# EAGLE board layout_breakout_pcb (EAGLE 9.7.0)
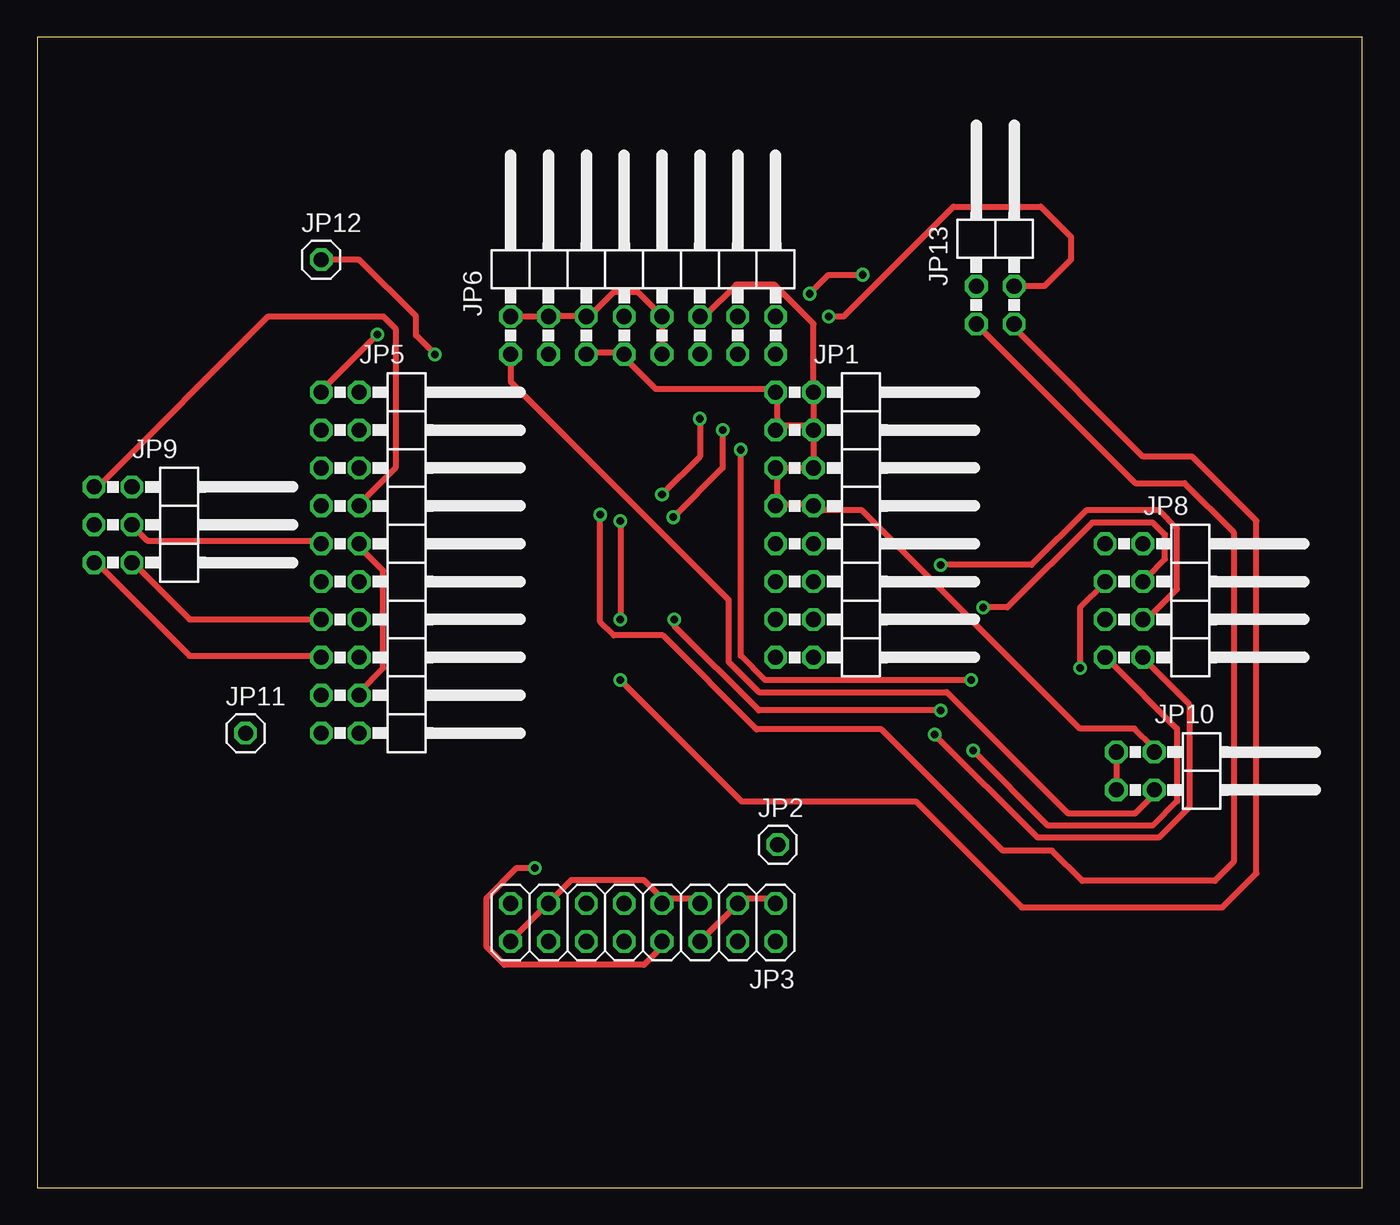
[diagram p0: board, top side]
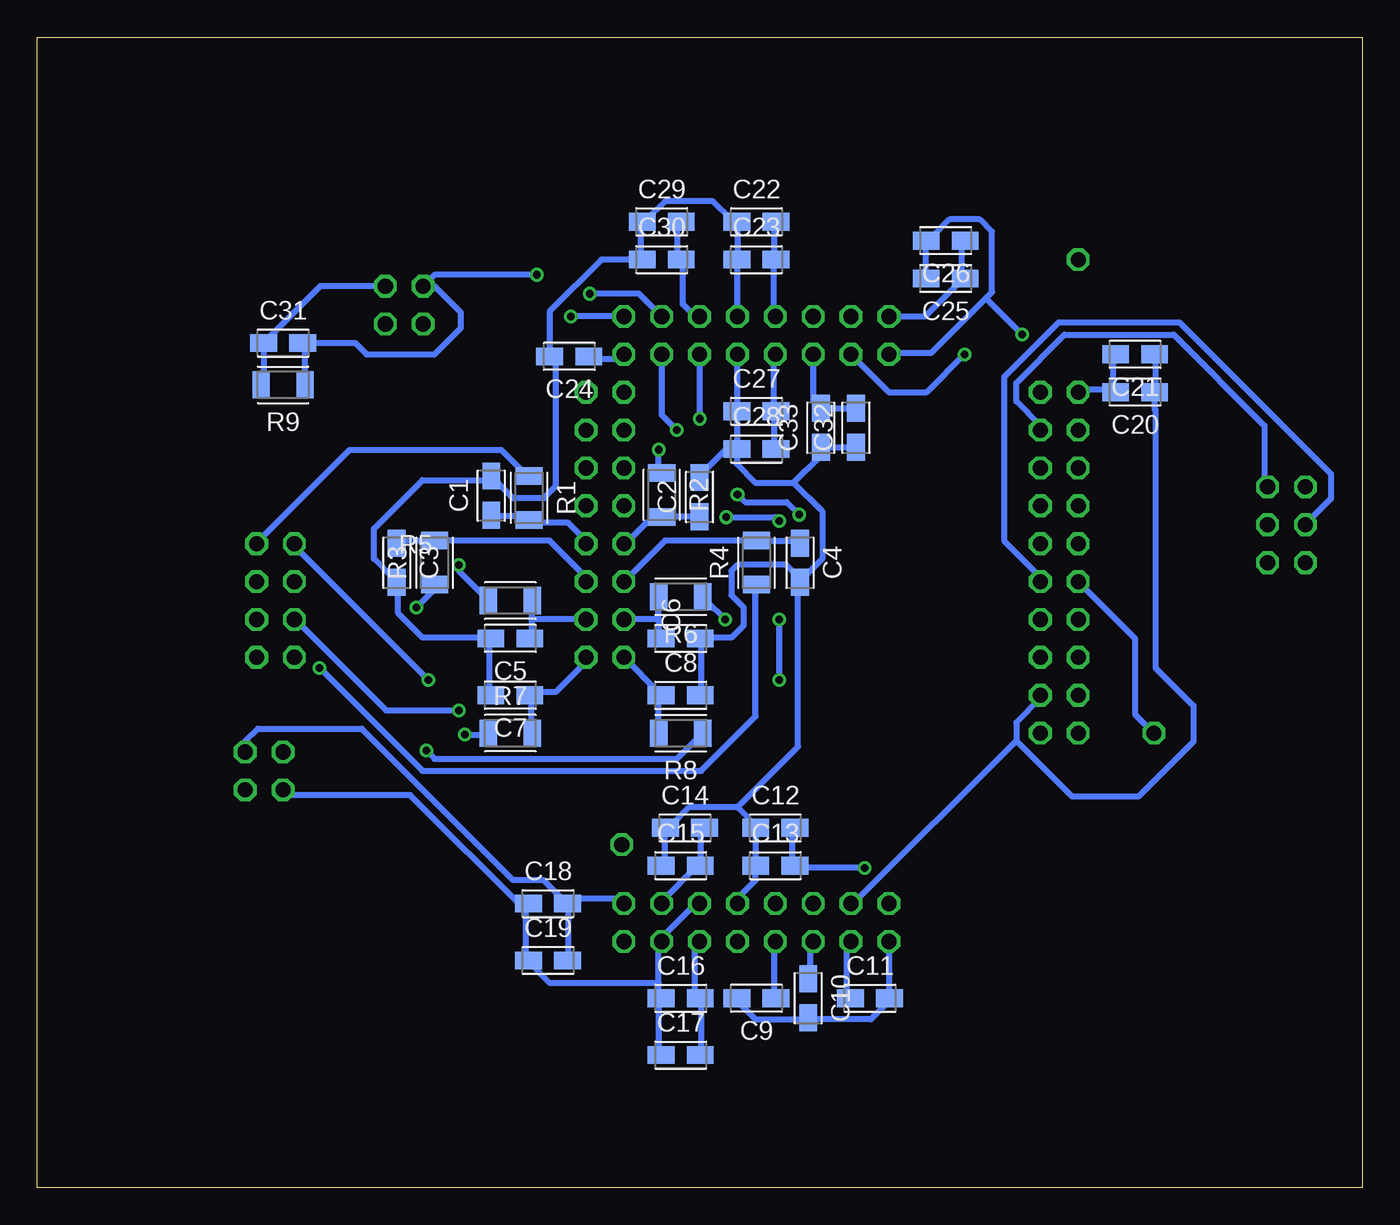
[diagram p1: board, bottom side, seen from below]

Size 88.88 x 77.14 mm. Coordinates in mm from the lower left corner, seen from the top.
Outline: 0,0 88.88,0 88.88,77.14 0,77.14 0,0
Copper layers (1*16): Top 0.035mm / dielectric 1.5mm / Bottom 0.035mm
Design rules "default *": minimum track width 16mil, minimum drill 20mil, track to track 16mil, track to pad 16mil, pad to pad 16mil, via to via 16mil, smd to smd 16mil, copper to edge 40mil, drill to drill 6mil, minimum pad ring 10mil, minimum via ring 8mil, stop-mask expansion 4mil, vias tented up to drill 0mil, thermal gap 10mil

## Footprints (pad centres in the part's own frame; a part is rotated, then mirrored left to right if it is on the bottom)
CAPM3216X180 = smd 1.796 x 1.189: 1 -1.31,0; 2 1.31,0
2X08/90 = drill 1.016 octagon: 1 -8.89,-6.35; 2 -8.89,-3.81; 3 -6.35,-6.35; 4 -6.35,-3.81; 5 -3.81,-6.35; 6 -3.81,-3.81; 7 -1.27,-6.35; 8 -1.27,-3.81; 9 1.27,-6.35; 10 1.27,-3.81; 11 3.81,-6.35; 12 3.81,-3.81; 13 6.35,-6.35; 14 6.35,-3.81; 15 8.89,-6.35; 16 8.89,-3.81
1X01 = drill 1.016 octagon: 1 0,0
2X08 = drill 1.016 octagon: 1 -8.89,-1.27; 2 -8.89,1.27; 3 -6.35,-1.27; 4 -6.35,1.27; 5 -3.81,-1.27; 6 -3.81,1.27; 7 -1.27,-1.27; 8 -1.27,1.27; 9 1.27,-1.27; 10 1.27,1.27; 11 3.81,-1.27; 12 3.81,1.27; 13 6.35,-1.27; 14 6.35,1.27; 15 8.89,-1.27; 16 8.89,1.27
2X10/90 = drill 1.016 octagon: 1 -11.43,-6.35; 2 -11.43,-3.81; 3 -8.89,-6.35; 4 -8.89,-3.81; 5 -6.35,-6.35; 6 -6.35,-3.81; 7 -3.81,-6.35; 8 -3.81,-3.81; 9 -1.27,-6.35; 10 -1.27,-3.81; 11 1.27,-6.35; 12 1.27,-3.81; 13 3.81,-6.35; 14 3.81,-3.81; 15 6.35,-6.35; 16 6.35,-3.81; 17 8.89,-6.35; 18 8.89,-3.81; 19 11.43,-6.35; 20 11.43,-3.81
2X04/90 = drill 1.016 octagon: 1 -3.81,-6.35; 2 -3.81,-3.81; 3 -1.27,-6.35; 4 -1.27,-3.81; 5 1.27,-6.35; 6 1.27,-3.81; 7 3.81,-6.35; 8 3.81,-3.81
2X03/90 = drill 1.016 octagon: 1 -2.54,-6.35; 2 -2.54,-3.81; 3 0,-6.35; 4 0,-3.81; 5 2.54,-6.35; 6 2.54,-3.81
2X02/90 = drill 1.016 octagon: 1 -1.27,-6.35; 2 -1.27,-3.81; 3 1.27,-6.35; 4 1.27,-3.81
RESC3216X70 = smd 1.165 x 1.815: 1 -1.475,0; 2 1.475,0

## Placement (x,y rotation side)
C1  [CAPM3216X180]  58.42,46.4 90 bottom
C2  [CAPM3216X180]  44.45,46.31 90 bottom
C3  [CAPM3216X180]  64.77,41.91 270 bottom
C4  [CAPM3216X180]  37.72,41.91 270 bottom
C5  [CAPM3216X180]  57.15,36.83 180 bottom
C6  [CAPM3216X180]  45.72,36.83 0 bottom
C7  [CAPM3216X180]  57.15,33.02 180 bottom
C8  [CAPM3216X180]  45.72,33.02 0 bottom
C9  [CAPM3216X180]  40.64,12.7 180 bottom
C10  [CAPM3216X180]  37.17,12.7 270 bottom
C11  [CAPM3216X180]  33.02,12.7 0 bottom
C12  [CAPM3216X180]  39.37,24.13 0 bottom
C13  [CAPM3216X180]  39.37,21.59 0 bottom
C14  [CAPM3216X180]  45.43,24.13 0 bottom
C15  [CAPM3216X180]  45.72,21.59 0 bottom
C16  [CAPM3216X180]  45.72,12.7 0 bottom
C17  [CAPM3216X180]  45.72,8.89 0 bottom
C18  [CAPM3216X180]  54.61,19.05 0 bottom
C19  [CAPM3216X180]  54.61,15.24 0 bottom
C20  [CAPM3216X180]  15.24,53.34 180 bottom
C21  [CAPM3216X180]  15.24,55.88 180 bottom
C22  [CAPM3216X180]  40.64,64.77 0 bottom
C23  [CAPM3216X180]  40.64,62.23 0 bottom
C24  [CAPM3216X180]  53.2,55.74 180 bottom
C25  [CAPM3216X180]  27.94,60.96 180 bottom
C26  [CAPM3216X180]  27.94,63.5 180 bottom
C27  [CAPM3216X180]  40.64,52.07 0 bottom
C28  [CAPM3216X180]  40.64,49.53 0 bottom
C29  [CAPM3216X180]  46.99,64.77 0 bottom
C30  [CAPM3216X180]  46.99,62.23 0 bottom
C31  [CAPM3216X180]  72.39,56.64 0 bottom
C32  [CAPM3216X180]  33.96,50.96 90 bottom
C33  [CAPM3216X180]  36.31,50.95 90 bottom
JP1  PINHD-2X8/90  [2X08/90]  55.88,44.45 270 top
JP2  PINHD-1X1  [1X01]  49.67,23 0 top
JP3  PINHD-2X8  [2X08]  40.64,17.78 180 top
JP5  PINHD-2X10/90  [2X10/90]  25.4,41.91 270 top
JP6  PINHD-2X8/90  [2X08/90]  40.64,62.23 0 top
JP8  PINHD-2X4/90  [2X04/90]  77.98,39.37 270 top
JP9  PINHD-2X3/90  [2X03/90]  10.16,44.45 270 top
JP10  PINHD-2X2/90  [2X02/90]  78.74,27.94 270 top
JP11  PINHD-1X1  [1X01]  13.97,30.48 0 top
JP12  PINHD-1X1  [1X01]  19.05,62.23 0 top
JP13  PINHD-2X2/90  [2X02/90]  64.26,64.26 0 top
R1  [RESC3216X70]  55.88,46.25 270 bottom
R2  [RESC3216X70]  46.99,46.46 270 bottom
R3  [RESC3216X70]  62.23,41.91 90 bottom
R4  [RESC3216X70]  40.64,41.91 90 bottom
R5  [RESC3216X70]  57.15,39.37 0 bottom
R6  [RESC3216X70]  45.72,39.63 180 bottom
R7  [RESC3216X70]  57.15,30.48 0 bottom
R8  [RESC3216X70]  45.72,30.48 180 bottom
R9  [RESC3216X70]  72.39,53.84 180 bottom

## Library data of the parts
C1-C33 = Capacitor; CATEGORY: Capacitor
JP1-JP3 JP5 JP6 JP8-JP13 = Connector; CATEGORY: CONNECTOR; SUB-CATEGORY: PIN-HEADER
R1-R9 = Resistor; CATEGORY: Resistor; SUB-CATEGORY: Fixed

## Nets
1N: JP8.8 R7.1
1P: JP8.7 R8.1
2N: JP8.6 R5.1
2P: JP8.5 R6.1
3N: JP8.4 R3.1
3P: JP8.3 R4.1
4N: JP8.2 R1.1
4P: JP8.1 R2.1
9: C1.1 JP1.10 R1.2
10: C2.1 JP1.9 R2.2
11: C3.1 JP1.12 R3.2
12: C4.1 JP1.11 R4.2
13: C5.1 JP1.14 R5.2
14: C6.1 JP1.13 R6.2
15: C7.1 JP1.16 R7.2
16: C8.1 JP1.15 R8.2
26: JP2.1
27: JP3.2
36: JP3.9
38: JP3.11
42: JP3.15
57: JP5.19
58: JP5.20
59: JP5.17
62: JP5.16
64: JP5.14
69: JP5.7
71: JP5.5
72: JP5.6
73: JP5.3
76: JP5.2
AVDD: C14.2 C15.2 C16.2 C17.2 C18.2 C19.2 C27.2 C28.2 C29.2 C30.2 C32.2 C33.2 JP1.1 JP1.2 JP1.3 JP1.4 JP1.5 JP1.6 JP1.7 JP1.8 JP3.1 JP3.3 JP3.6 JP6.5 JP6.7 JP6.12 JP10.2
CLKSEL: JP6.3 JP12.1
CS: JP5.12 JP9.3
DIN: JP5.15 JP9.5
DOUT: JP5.8 JP9.1
DRDY: JP5.4 JP9.2
DVDD: C20.2 C21.2 C25.2 C26.2 JP5.1 JP6.1 JP10.4
GND: C1.2 C2.2 C3.2 C4.2 C5.2 C6.2 C7.2 C8.2 C9.2 C10.2 C11.2 C12.1 C13.1 C14.1 C15.1 C16.1 C17.1 C18.1 C19.1 C20.1 C21.1 C22.1 C23.1 C24.2 C25.1 C26.1 C27.1 C28.1 C29.1 C30.1 C32.1 C33.1 JP3.4 JP3.5 JP3.7 JP3.13 JP3.16 JP5.10 JP5.18 JP6.2 JP6.4 JP6.6 JP6.9 JP6.10 JP10.1 JP10.3
N$1: C9.1 JP3.10
N$2: C10.1 JP3.12
N$3: C11.1 JP3.14
N$4: C12.2 C13.2 JP3.8
N$6: C22.2 C23.2 JP6.8
N$7: C24.1 JP6.15
RESET: JP5.13 JP9.6
RLDIN: JP6.13 JP13.3
RLDINV: C31.2 JP6.14 JP13.2 R9.1
RLDOUT: C31.1 JP6.16 JP13.4 R9.2
RLDREF: JP6.11 JP13.1
SCLK: JP5.9 JP9.4
START: JP5.11 JP11.1

## Tracks (layer width: path | path; a pad name or v marks a point on that pad's centre or on a via)
1N  (via drill 0.51)
  Top 0.406: v60.2,30.38 67.11,23.47 75.24,23.47 77.27,25.5 77.27,32.41 74.42,35.26 JP8.8
  Bottom 0.406: v60.2,30.38 58.98,30.38 R7.1
1P  (via drill 0.51)
  Top 0.406: JP8.7 71.98,35.26 76.45,30.79 76.45,25.91 74.83,24.28 67.8,24.28 v62.78,29.3
  Bottom 0.406: R8.1 44.35,30.38 45.97,28.75 62.23,28.75 v62.78,29.3
2N  (via drill 0.51)
  Top 0.406: v60.6,41.76 66.7,41.76 70.36,45.42 75.24,45.42 76.45,44.2 76.45,40.13 74.42,38.1 JP8.6
  Bottom 0.406: v60.6,41.76 60.6,41.35 58.98,39.73 R5.1
2P  (via drill 0.51)
  Top 0.406: v42.72,38.1 42.72,37.69 48.41,32 v60.6,32
  Bottom 0.406: v42.72,38.1 43.94,39.32 R6.1 | v60.6,32 65.48,32 71.58,38.1 JP8.5
3N  (via drill 0.51)
  Top 0.406: v63.45,38.91 65.07,38.91 70.76,44.6 74.83,44.6 75.64,43.79 75.64,42.16 74.42,40.95 JP8.4
  Bottom 0.406: v63.45,38.91 62.23,40.13 R3.1
3P  (via drill 0.51)
  Top 0.406: v69.95,34.85 69.95,38.91 71.58,40.54 JP8.3
  Bottom 0.406: v69.95,34.85 63.04,27.94 44.35,27.94 40.69,31.6 40.69,40.13 R4.1
4N
  Bottom 0.406: R1.1 56.13,47.85 57.76,49.48 67.92,49.48 74.02,43.38 JP8.2
4P  (via drill 0.51)
  Top 0.406: v47.19,49.48 47.19,35.66 48.82,34.04 v62.64,34.04
  Bottom 0.406: v47.19,49.48 47.19,48.26 R2.1 | v62.64,34.04 71.58,42.98 JP8.1
9
  Bottom 0.406: C1.1 58.17,45.01 56.13,45.01 R1.2 55.73,44.6 53.29,44.6 52.07,43.38 JP1.10
10
  Bottom 0.406: C2.1 44.76,45.01 46.79,45.01 R2.2 47.19,44.6 48.01,44.6 49.23,43.38 JP1.9
11
  Bottom 0.406: R3.2 64.67,43.38 C3.1 | R3.2 54.51,43.38 52.07,40.95 JP1.12 | R3.2
12
  Bottom 0.406: C4.1 37.85,43.38 40.28,43.38 R4.2 40.69,43.38 46.79,43.38 JP1.11
13
  Bottom 0.406: 55.73,38.1 55.73,39.32 R5.2 | 55.73,38.1 55.73,36.88 C5.1 | JP1.14 55.73,38.1
14
  Bottom 0.406: 47.19,38.1 47.19,39.32 R6.2 | 47.19,38.1 47.19,36.88 C6.1 | 47.19,38.1 JP1.13
15
  Bottom 0.406: R7.2 55.73,30.79 55.73,32.82 C7.1 55.73,33.22 54.1,33.22 52.07,35.26 JP1.16
16
  Bottom 0.406: R8.2 47.19,30.79 47.19,32.82 C8.1 47.19,33.22 JP1.15
AVDD
  Top 0.406: JP6.5 37.03,55.98 39.07,55.98 JP6.7 39.47,55.58 41.5,53.54 49.23,53.54 JP1.1 49.63,53.14 49.63,51.11 | 49.63,48.26 49.63,45.82 | 49.63,45.82 52.07,45.82 JP1.8 52.07,45.42 55.32,45.42 69.95,30.79 73.61,30.79 74.83,29.57 JP10.2 | 49.63,45.82 JP1.7 | 49.63,48.26 JP1.6 JP1.4 52.07,51.11 | 49.63,48.26 JP1.5 | 52.07,51.11 JP1.2 52.07,57.93 49.44,60.55 46.89,60.55 44.76,58.42 JP6.12 | 52.07,51.11 49.63,51.11 | 49.63,51.11 JP1.3 | JP3.1 49.23,19.41 47.19,19.41 JP3.3 JP3.6
  Bottom 0.406: C28.2 39.47,49.89 39.47,51.92 C27.2 39.47,52.32 39.47,55.58 JP6.7 | C29.2 45.97,64.52 45.97,62.48 C30.2 45.57,62.08 45.57,59.23 44.76,58.42 JP6.12 | C17.2 44.35,9.25 44.35,12.5 C16.2 44.76,12.9 44.76,16.15 JP3.6 | C14.2 44.35,23.88 44.35,21.84 C15.2 44.76,21.44 46.79,19.41 JP3.3 | C19.2 53.29,15.34 53.29,19 C18.2 | JP10.2 74.93,29.92 74.07,30.79 67.11,30.79 56.95,20.62 54.91,20.62 53.7,19.41 C18.2 | JP3.1 49.63,19.41 53.29,19.41 C18.2 | JP6.5 36.83,52.78 C33.2 C32.2
CLKSEL  (via drill 0.51)
  Top 0.406: v26.67,55.88 25.4,57.15 25.4,58.42 21.59,62.23 JP12.1
  Bottom 0.406: JP6.3 31.75,53.34 29.21,53.34 v26.67,55.88
CS
  Bottom 0.406: JP5.12 21.59,40.95 24.03,43.38 24.03,54.36 20.37,58.01 12.24,58.01 2.08,47.85 2.08,46.23 3.71,44.6 JP9.3
DIN
  Top 0.406: JP5.15 18.75,35.66 10.21,35.66 4.12,41.76 JP9.5
DOUT
  Top 0.406: JP5.8 21.59,45.82 24.03,48.26 24.03,57.61 23.22,58.42 15.49,58.42 4.12,47.04 JP9.1
DRDY
  Bottom 0.406: JP9.2 6.55,47.04 6.55,51.11 12.65,57.2 19.96,57.2 23.22,53.95 23.22,52.73 21.59,51.11 JP5.4
DVDD  (via drill 0.51)
  Top 0.406: JP6.1 31.75,54.05 46.38,39.42 46.38,35.26 48.41,33.22 61.01,33.22 69.14,25.09 73.66,25.09 74.93,26.37 JP10.4 | v22.81,57.2 19.15,53.54 JP5.1
  Bottom 0.406: 16.71,53.54 16.71,55.58 C21.2 | 16.71,53.54 18.75,53.54 JP5.1 | 16.71,53.54 C20.2 | C25.2 29.31,61.27 29.31,63.3 C26.2 28.91,63.7 27.69,64.92 25.65,64.92 24.84,64.11 24.84,60.05 25.25,59.64 | 25.25,59.64 28.91,55.98 31.75,55.98 JP6.1 | 25.25,59.64 v22.81,57.2
GND
  Top 0.406: JP6.2 JP6.4 JP6.6 37.03,58.42 38.66,60.05 40.28,60.05 JP6.10 JP6.9 | JP5.10 21.59,42.98 23.22,41.35 23.22,34.85 21.59,33.22 JP5.18 | JP3.16 31.75,16.56 34.19,19 JP3.13 34.6,19.41 35.81,20.62 40.69,20.62 41.91,19.41 | 41.91,19.41 44.35,19.41 JP3.5 | JP10.1 JP10.3 | 41.91,19.41 JP3.7
  Bottom 0.406: C7.2 58.57,33.22 58.57,36.47 C5.2 58.57,36.88 63.04,36.88 64.67,38.51 64.67,40.54 C3.2 65.07,40.95 66.29,42.16 66.29,44.2 63.04,47.45 58.57,47.45 C1.2 58.17,47.45 56.95,46.23 54.91,46.23 54.1,47.04 54.1,55.58 C24.2 54.51,58.76 51.04,62.23 C30.1 48.41,62.48 48.41,64.52 C29.1 48.01,64.92 46.79,66.14 43.54,66.14 42.32,64.92 C22.1 41.91,64.52 41.91,62.48 C23.1 41.91,62.08 JP6.10 | C26.1 26.87,63.3 26.87,61.27 C25.1 26.87,60.86 29.31,58.42 JP6.2 | C8.2 44.35,33.22 44.35,36.47 C6.2 44.35,36.88 42.32,36.88 41.5,37.69 41.5,38.91 42.32,39.73 42.32,41.35 41.91,41.76 38.66,41.76 37.85,40.95 C4.2 | C4.2 37.44,40.95 36.22,42.16 36.22,45.35 38.14,47.27 | C28.1 41.91,49.89 41.91,51.92 C27.1 41.91,52.32 JP6.9 | C2.2 44.35,47.85 42.32,49.89 C28.1 | C21.1 13.87,55.58 13.87,53.54 C20.1 13.93,52.19 13.87,52.13 13.87,34.86 11.33,32.32 11.33,29.91 15.03,26.21 19.46,26.21 23.22,29.97 | 23.22,29.97 23.22,31.19 21.59,32.82 JP5.18 | C9.2 41.91,12.5 40.69,11.28 37.44,11.28 C10.2 37.03,11.28 32.97,11.28 31.75,12.5 C11.2 31.75,12.9 JP3.16 | C15.1 46.79,21.84 46.79,23.88 C14.1 46.38,24.28 45.16,25.5 41.91,25.5 | JP3.7 41.91,19.41 40.69,20.62 40.69,21.44 C13.1 40.69,21.84 40.69,23.88 C12.1 40.69,24.28 41.91,25.5 | 56.13,18.59 56.13,19 C18.1 56.13,18.59 | 56.13,18.59 56.13,15.34 C19.1 55.73,14.94 54.51,13.72 47.19,13.72 | C17.1 47.19,9.25 47.19,12.5 C16.1 47.19,12.9 47.19,13.72 | 47.19,13.72 47.19,16.15 JP3.4 47.19,16.56 44.76,19 JP3.5 | 56.13,18.59 63.86,26.31 72.39,26.31 JP10.3 | 23.22,29.97 34.19,19 JP3.13 | 41.91,25.5 37.85,29.57 37.85,40.54 C4.2 | C28.1 41.95,48.53 40.69,47.27 38.14,47.27
  Bottom 0.406: C32.1 C33.1 36.31,49.09 38.14,47.27
N$1
  Bottom 0.406: C9.1 39.47,12.9 39.47,16.15 JP3.10
N$2
  Bottom 0.406: C10.1 37.03,14.12 37.03,16.15 JP3.12
N$3
  Bottom 0.406: C11.1 34.6,12.9 34.6,16.15 JP3.14
N$4  (via drill 0.51)
  Top 0.406: v33.38,21.44 32.16,21.44 30.12,19.41 30.12,16.15 31.34,14.94 40.69,14.94 41.91,16.15 JP3.8
  Bottom 0.406: C12.2 38.25,23.88 38.25,21.84 C13.2 37.85,21.44 v33.38,21.44
N$6
  Bottom 0.406: C22.2 39.47,64.52 39.47,62.48 C23.2 39.47,62.08 39.47,58.42 JP6.8
N$7
  Bottom 0.406: C24.1 51.66,55.58 49.63,55.58 JP6.15
RESET
  Top 0.406: JP5.13 10.21,38.1 6.55,41.76 JP9.6
RLDIN  (via drill 0.51)
  Top 0.406: v45.97,50.8 45.97,48.26 v42.67,44.96 | v39.12,44.7 v39.12,38.1 | v39.12,34.04 47.24,25.91 58.93,25.91 66.04,18.8 79.5,18.8 81.79,21.08 81.79,44.7 77.47,49.02 74.17,49.02 65.53,57.66 JP13.3
  Bottom 0.406: JP6.13 46.99,51.82 v45.97,50.8 | v42.67,44.96 39.37,44.96 v39.12,44.7 | v39.12,38.1 v39.12,34.04
RLDINV  (via drill 0.51)
  Top 0.406: v51.82,59.94 53.09,61.21 v55.37,61.21
  Bottom 0.406: JP6.14 48.51,59.94 v51.82,59.94 | v55.37,61.21 62.23,61.21 JP13.2 62.23,60.45 60.45,58.67 60.45,57.66 62.23,55.88 66.8,55.88 67.56,56.64 C31.2 70.91,56.48 R9.1
RLDOUT  (via drill 0.51)
  Top 0.406: v53.09,58.42 54.1,58.42 61.47,65.79 67.31,65.79 69.34,63.75 69.34,62.23 67.56,60.45 JP13.4
  Bottom 0.406: JP6.16 v53.09,58.42 | JP13.4 69.89,60.45 C31.1 73.7,54 R9.2
RLDREF  (via drill 0.51)
  Top 0.406: JP13.1 73.66,47.24 76.96,47.24 80.26,43.94 80.26,21.84 78.99,20.57 70.1,20.57 68.07,22.61 64.77,22.61 56.64,30.73 48.26,30.73 41.96,37.03 38.67,37.03 37.76,37.95 v37.76,45.13 | v41.91,46.48 44.45,49.02 v44.45,51.56
  Bottom 0.406: v37.76,45.13 38.61,45.97 41.4,45.97 v41.91,46.48 | JP6.11 v44.45,51.56
SCLK
  Top 0.406: JP5.9 18.75,43.38 7.37,43.38 6.55,44.2 JP9.4
START
  Bottom 0.406: JP5.11 15.24,36.83 15.24,31.75 JP11.1